# Altium PCB Tigershark 3D R1.8.PcbDoc (part 2 of 3)
Units mil, origin at the board's own origin, x right, y up, seen from the top; angles counter-clockwise.
Board outline 5500 x 4600 mil, 4 copper layers (Top Layer, Groun Plane, Power Plane, Bottom Layer), stack 61.73 mil thick; 307 components, 236 nets, 994 pads, 1215 vias.
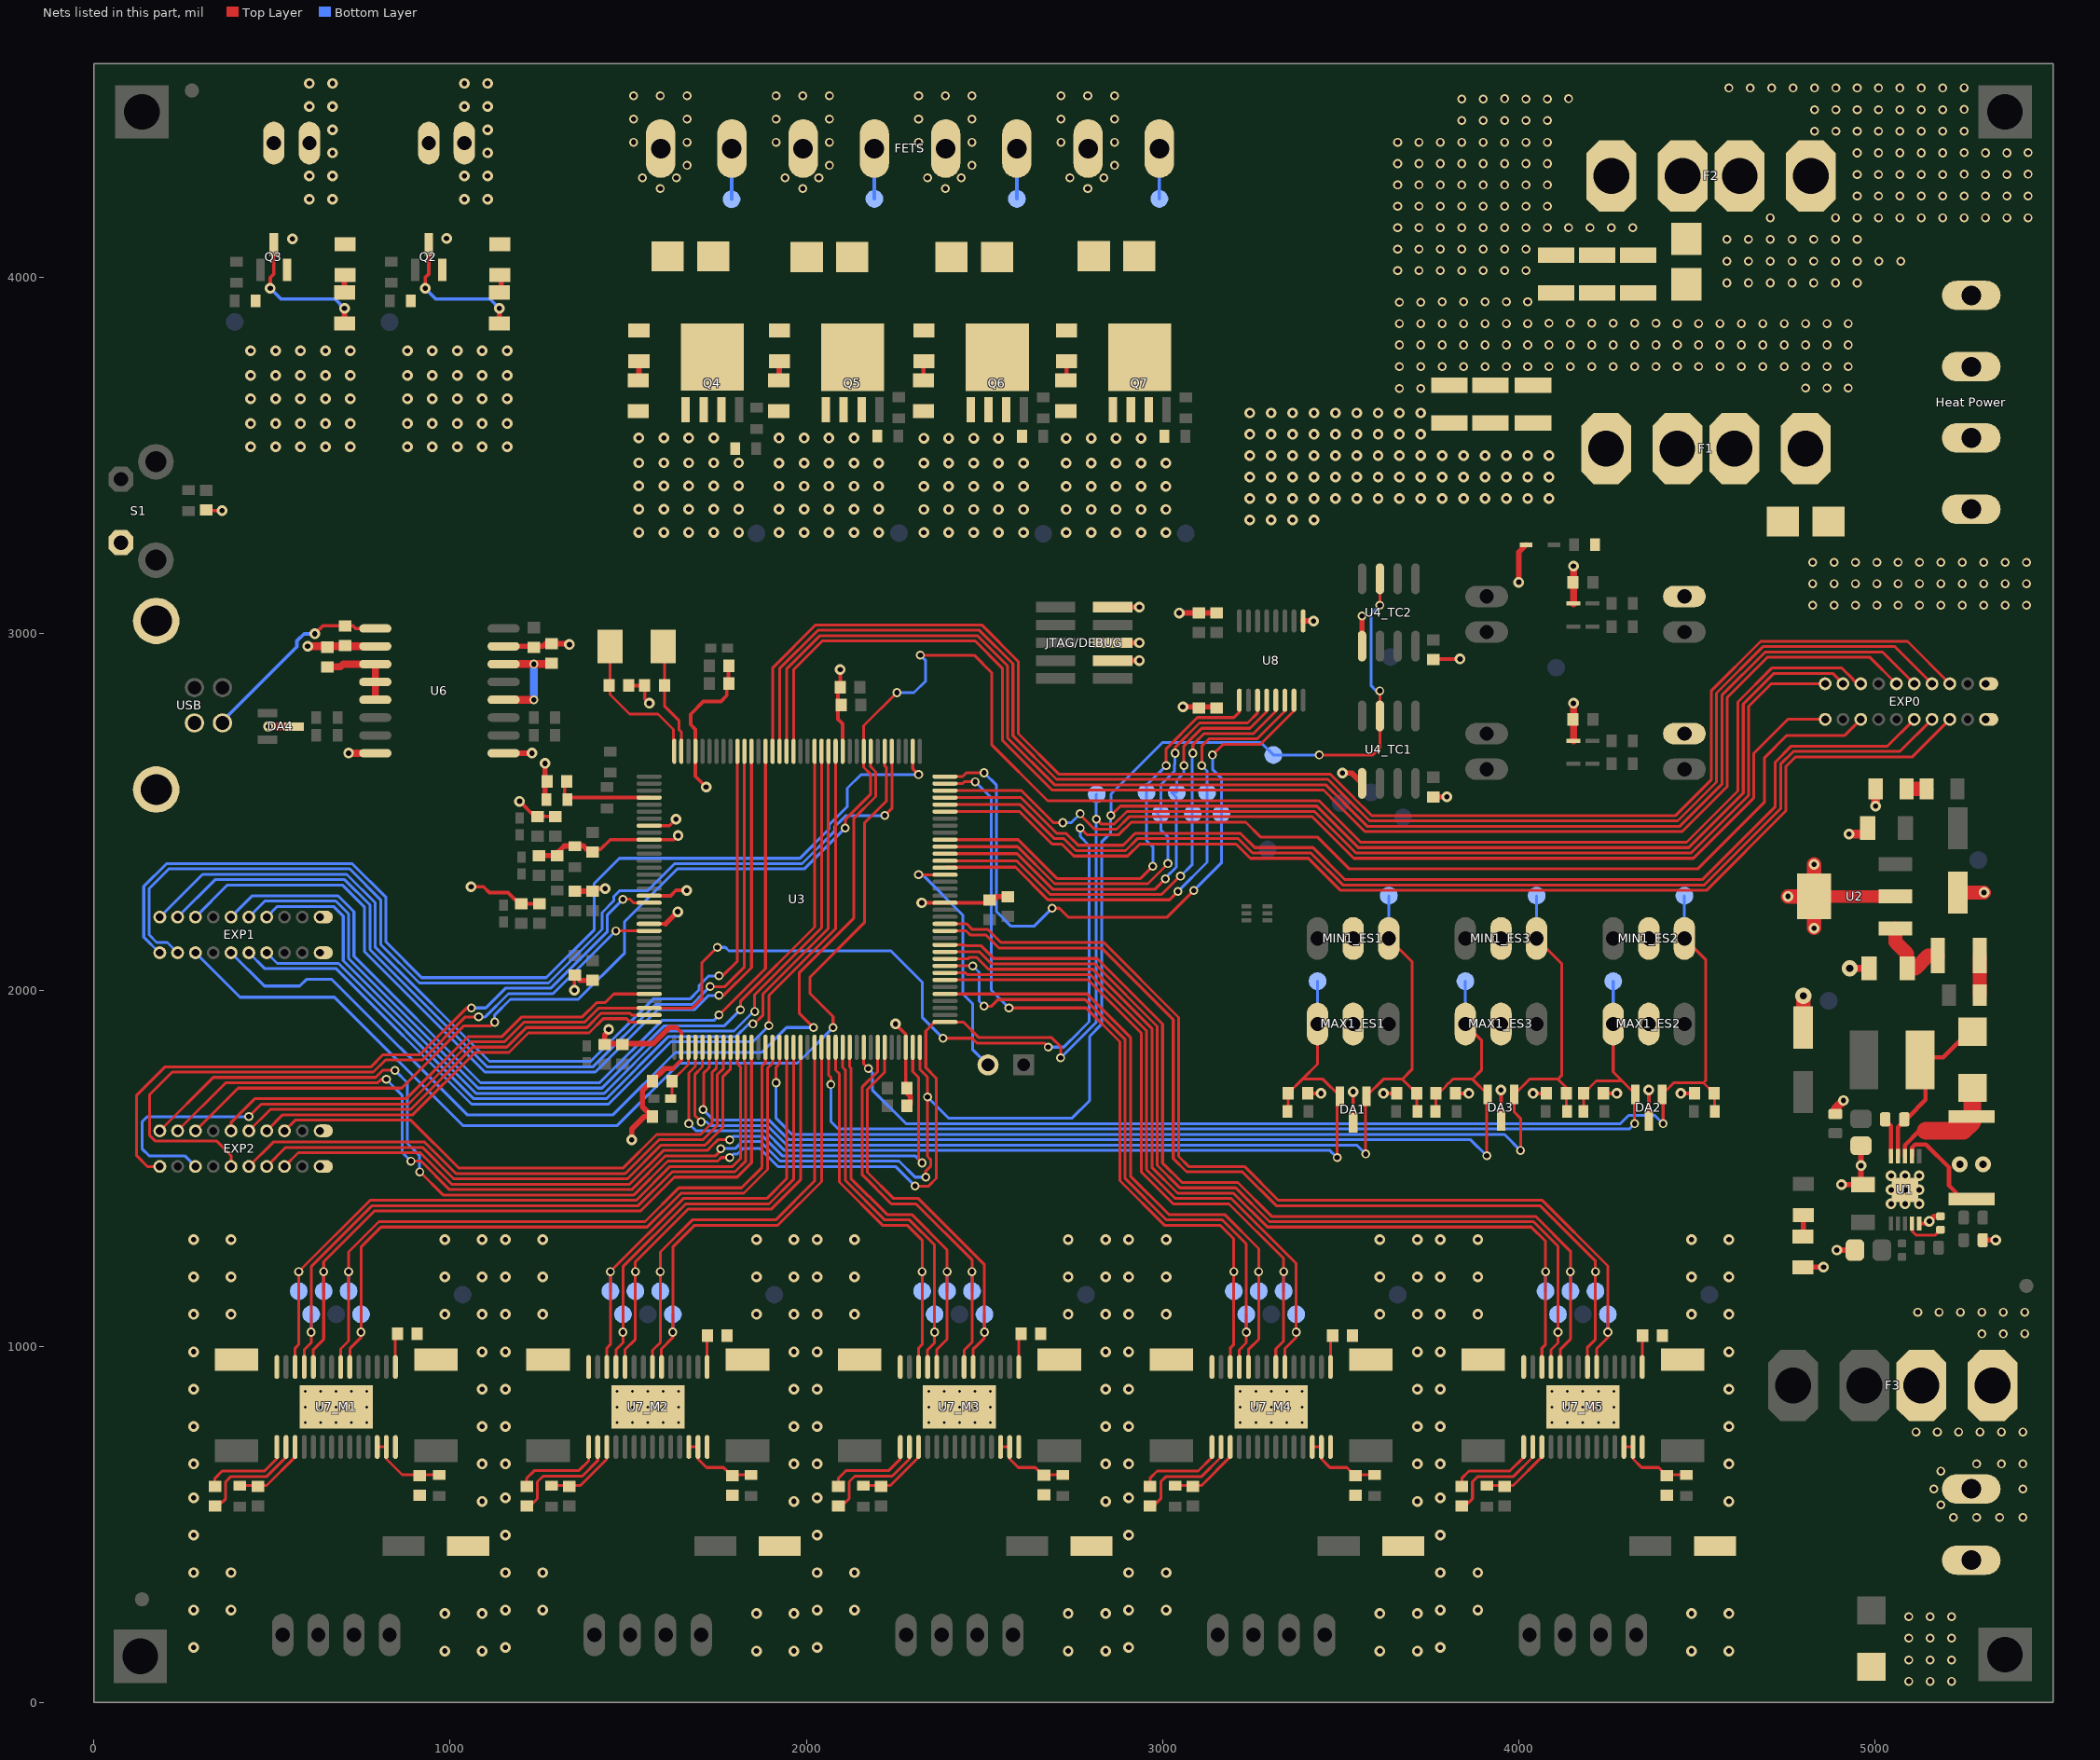
[diagram p4: the nets of this part, all layers, seen from the top]

## Via types
v1: diameter 25, hole 15, Top Layer to Bottom Layer, tented both sides, 594 vias
v2: diameter 30, hole 15, Top Layer to Bottom Layer, tented both sides, 518 vias
v3: diameter 19.68, hole 7.87, Top Layer to Bottom Layer, tented both sides, 75 vias
v4: diameter 50, hole 28, Top Layer to Bottom Layer, tented both sides, 10 vias
v5: diameter 30, hole 15, Top Layer to Bottom Layer, 9 vias
v6: diameter 45, hole 20, Top Layer to Bottom Layer, tented both sides, 9 vias

## Nets (pads, with @x,y where several pads share a name; then routed paths per layer and width w, separated by ;. In a path a pad name is that pad's centre, name@x,y a point inside that pad or via, vN(x,y) a via of type N, cw(c..) or ccw(c..) an arc to the next point about the centre after c; other vN are vias at no path point) (continued)
+12VCC2: C8.2 C12.2 C14.2 D6.2 D12.2 D15.2 D17.2 F1.2 FAN-1.1 FAN-2.1 FETS.1 FETS.3 FETS.5 R1.2 R13.1 R47.1 R56.2 R60.2 R64.2
  other v1: 1590,4250 1990,4250 2390,4250 1540,4280 1635,4280 1940,4280 2035,4280 2340,4280 2435,4280 1665,4315 2065,4315 2465,4315 1515,4380 1665,4380 1915,4380 2065,4380 2315,4380 2465,4380 1515,4445 1665,4445 1915,4445 2065,4445 2315,4445 2465,4445 1515,4510 1590,4510 1665,4510 1915,4510 1990,4510 2065,4510 2315,4510 2390,4510 2465,4510
  other v2: 3245,3320 3305,3320 3365,3320 3425,3320 3245,3380 3305,3380 3365,3380 3425,3380 3485,3380 3545,3380 3605,3380 3665,3380 3725,3380 3785,3380 3845,3380 3905,3380 3965,3380 4025,3380 4085,3380 3245,3440 3305,3440 3365,3440 3425,3440 3485,3440 3545,3440 3605,3440 3665,3440 3725,3440 3785,3440 3845,3440 3905,3440 3965,3440 4025,3440 4085,3440 3245,3500 3305,3500 3365,3500 3425,3500 3485,3500 3545,3500 3605,3500 3665,3500 3725,3500 3785,3500 3845,3500 3905,3500 3965,3500 4025,3500 4085,3500 3245,3560 3305,3560 3365,3560 3425,3560 3485,3560 3545,3560 3605,3560 3665,3560 3725,3560 3245,3620 3305,3620 3365,3620 3425,3620 3485,3620 3545,3620 3605,3620 3665,3620 3725,3620 605,4220 670,4220 1040,4220 1105,4220 605,4285 670,4285 1040,4285 1105,4285 670,4350 1105,4350 670,4415 1105,4415 605,4480 670,4480 1040,4480 1105,4480 605,4545 670,4545 1040,4545 1105,4545
+12VCC3: C3.2 C5.2 C6.2 D4.2 D19.2 F2.2 FETS.7 R68.2
  other v1: 3660,4020 3720,4020 3780,4020 3840,4020 3900,4020 3960,4020 4020,4020 3660,4080 3720,4080 3780,4080 3840,4080 3900,4080 3960,4080 4020,4080 3660,4140 3720,4140 3780,4140 3840,4140 3900,4140 3960,4140 4020,4140 4080,4140 4140,4140 4200,4140 4260,4140 4320,4140 3660,4200 3720,4200 3780,4200 3840,4200 3900,4200 3960,4200 4020,4200 4080,4200 2790,4250 3660,4260 3720,4260 3780,4260 3840,4260 3900,4260 3960,4260 4020,4260 4080,4260 2740,4280 2835,4280 2865,4315 3660,4320 3720,4320 3780,4320 3840,4320 3900,4320 3960,4320 4020,4320 4080,4320 2715,4380 2865,4380 3660,4380 3720,4380 3780,4380 3840,4380 3900,4380 3960,4380 4020,4380 4080,4380 3840,4441 3900,4441 3960,4441 4020,4441 4080,4441 2715,4445 2865,4445 3840,4501 3900,4501 4020,4501 4080,4501 3960,4502 4140,4502 2715,4510 2790,4510 2865,4510
AN_EXP0: EXP1.7 U3.14 | length 2477.1
  Top Layer w8: v1(1850,1905) 1853.23,1905 1878.5,1930.27 1878.5,1989.71 2061,2172.21 2061,2668.87 U3.14@2062.48,2670.35
  Bottom Layer w8: EXP1.7@485,2105 515,2075 686.51,2075 1066.51,1695 1438.49,1695 1613.49,1870 1802.98,1870 1837.98,1905 v1(1850,1905)
AN_EXP1: EXP1.14 U3.15 | length 2576.5
  Top Layer w8: v1(1855,1940) 1855,1987.43 2042.8,2175.22 U3.15@2042.8,2670.35
  Bottom Layer w8: EXP1.14@485,2205 515,2235 672.72,2235 700,2207.72 700,2082.72 1072.72,1710 1432.28,1710 1607.28,1885 1796.77,1885 1851.77,1940 v1(1855,1940)
AVREF: C65.2 FB9.2 U3.75 | length 165.4
  Top Layer w8: FB9.2@1618.62,1695 1622.56,1698.94 C65.2@1622.56,1745 1668.78,1791.22 U3.75@1668.78,1839.65
BED_PWM: TP38.1 U3.144 U8.7 | length 1884.6
  Top Layer w8: U3.144@2389.25,2599.49 2438.39,2599.49 2448.9,2610 v1(2498.9,2610) ; v1(2690,2230) 2710,2230 2735,2205 3013.14,2205 v1(3087.78,2279.64) ; v1(3140,2660) 3170,2690 3275,2690 3368.98,2783.98 U8.7@3368.98,2813.78
  Bottom Layer w8: v1(2498.9,2610) 2533.9,2575 2533.9,2220 2574.9,2179 2639,2179 v1(2690,2230) ; v1(3087.78,2279.64) 3165,2356.86 3165,2595 3140,2620 v1(3140,2660)
DIR1: TP39_M1.1 U3.87 U7_M1.20 | length 1964.8
  Top Layer w8: U7_M1.20@718.39,942.2 718.39,993.39 750,1025 ; v1(750,1040) 750,1278.93 806.07,1335 1553.35,1335 1648.35,1430 1824.3,1430 1890.94,1496.64 1890.94,1780.94 1905,1795 U3.87@1905,1839.65
  Bottom Layer w8: v1(750,1040) TP39_M1.1@750,1090
DIR2: TP39_M2.1 U3.94 U7_M2.20 | length 1270.6
  Top Layer w8: U7_M2.20@1593.39,942.2 1593.39,993.17 1625,1024.79 v1(1625,1040) 1625,1278.93 1686.07,1340 1920,1340 2042.8,1462.8 U3.94@2042.8,1839.65
  Bottom Layer w8: v1(1625,1040) TP39_M2.1@1625,1090
DIR3: TP39_M3.1 U3.103 U7_M3.20 | length 1158.3
  Top Layer w8: U3.103@2219.96,1839.65 2219.96,1769.96 2171.22,1721.22 2171.22,1488.78 2245,1415 2314.4,1415 2500,1229.4 v1(2500,1040) 2500,1023.79 2471.21,995 2470,995 2468.39,993.39 U7_M3.20@2468.39,942.2
  Bottom Layer w8: v1(2500,1040) TP39_M3.1@2500,1090
DIR4: TP39_M4.1 U3.116 U7_M4.20 | length 1905.6
  Top Layer w8: U3.116@2389.25,2048.31 2446.69,2048.31 2451.38,2043.62 2797.44,2043.62 2955,1886.07 2955,1496.07 3036.07,1415 3192.72,1415 3375,1232.72 v1(3375,1040) 3375,1025 3343.39,993.39 U7_M4.20@3343.39,942.2
  Bottom Layer w8: v1(3375,1040) TP39_M4.1@3375,1090
DIR5: TP39_M5.1 U3.123 U7_M5.20 | length 2833.8
  Top Layer w8: U3.123@2389.25,2186.1 2450.11,2186.1 2466.21,2170 2509.84,2170 2546.21,2133.62 2834.72,2133.62 3045,1923.35 3045,1533.35 3073.35,1505 3230,1505 3325,1410 4066.07,1410 4250,1226.07 v1(4250,1040) 4250,1025 4218.39,993.39 U7_M5.20@4218.39,942.2
  Bottom Layer w8: v1(4250,1040) TP39_M5.1@4250,1090
DIR_EXP1: EXP1.6 U3.13 | length 2575
  Top Layer w8: v1(1895,1900) 1895,1985 2082.17,2172.17 U3.13@2082.17,2670.35
  Bottom Layer w8: EXP1.6@435,2105 480,2060 680.29,2060 1060.29,1680 1444.71,1680 1619.71,1855 1850,1855 v1(1895,1900)
DIR_EXP2: EXP1.15 U3.16 | length 2592
  Top Layer w8: v1(1815,1945) 1815,1968.64 2023.11,2176.75 U3.16@2023.11,2670.35
  Bottom Layer w8: EXP1.15@435,2205 480,2250 678.93,2250 715,2213.93 715,2088.93 1078.93,1725 1426.07,1725 1601.07,1900 1770,1900 v1(1815,1945)
EN1: TP32_M1.1 U3.86 U7_M1.21 | length 1987.2
  Top Layer w8: U7_M1.21@692.8,942.2 692.8,992.8 715,1015 v1(715,1210) 715,1265.15 799.85,1350 1547.13,1350 1642.13,1445 1818.09,1445 1875.94,1502.86 1875.94,1787.16 1885.32,1796.53 U3.86@1885.32,1839.65
  Bottom Layer w8: TP32_M1.1@715,1155 v1(715,1210)
EN2: TP32_M2.1 U3.93 U7_M2.21 | length 1278.1
  Top Layer w8: U7_M2.21@1567.8,942.2 1567.8,988.8 1590,1011 v1(1590,1210) 1590,1265.15 1679.85,1355 1913.79,1355 2023.11,1464.32 U3.93@2023.11,1839.65
  Bottom Layer w8: TP32_M2.1@1590,1155 v1(1590,1210)
EN3: TP32_M3.1 U3.102 U7_M3.21 | length 1148.4
  Top Layer w8: U3.102@2200.28,1839.65 2200.28,1771.49 2156.22,1727.43 2156.22,1482.57 2238.79,1400 2308.18,1400 2465,1243.18 v1(2465,1210) 2465,1011.21 2442.8,989.01 U7_M3.21@2442.8,942.2
  Bottom Layer w8: TP32_M3.1@2465,1155 v1(2465,1210)
EN4: TP32_M4.1 U3.115 U7_M4.21 | length 1871.7
  Top Layer w8: U3.115@2389.25,2028.62 2791.23,2028.62 2940,1879.85 2940,1489.85 3029.85,1400 3186.51,1400 3340,1246.51 v1(3340,1210) 3340,1015 3317.8,992.8 U7_M4.21@3317.8,942.2
  Bottom Layer w8: TP32_M4.1@3340,1155 v1(3340,1210)
EN5: TP32_M5.1 U3.122 U7_M5.21 | length 2799.8
  Top Layer w8: U3.122@2389.25,2166.42 2448.58,2166.42 2460,2155 2503.62,2155 2540,2118.62 2828.51,2118.62 3030,1917.13 3030,1527.13 3067.13,1490 3223.79,1490 3318.79,1395 4059.85,1395 4215,1239.85 v1(4215,1210) 4215,1020 4192.8,997.8 U7_M5.21@4192.8,942.2
  Bottom Layer w8: TP32_M5.1@4215,1155 v1(4215,1210)
EN_EXP1: EXP1.5 U3.8 | length 2826.6
  Top Layer w8: v1(2020,1895) 1980.61,1934.39 1980.61,2049.39 2132.75,2201.54 2132.75,2480.94 2194.9,2543.08 2194.9,2612.68 2180.59,2626.98 U3.8@2180.59,2670.35
  Bottom Layer w8: EXP1.5@385,2105 478.5,2011.5 577.71,2011.5 596.21,2030 667.87,2030 1047.87,1650 1457.13,1650 1632.13,1825 1874.45,1825 1944.45,1895 v1(2020,1895)
EN_EXP2: EXP1.16 U3.23 | length 2558.6
  Top Layer w8: v1(1755,1930) 1885.32,2060.32 U3.23@1885.32,2670.35
  Bottom Layer w8: EXP1.16@385,2205 445,2265 685.15,2265 730,2220.15 730,2095.15 1085.15,1740 1419.85,1740 1594.85,1915 1740,1915 v1(1755,1930)
ERASE: P1.2 U3.130 | length 695.4
  Top Layer w8: v1(2315,2323.9) U3.130@2389.25,2323.9
  Bottom Layer w8: v1(2315,2323.9) 2326.1,2323.9 2438.9,2211.1 2438.9,1990 2466.4,1962.5 2466.4,1833.6 P1.2@2510,1790
EXP_CS: EXP0.1 U3.142 | length 2835.7
  Top Layer w8: U3.142@2389.25,2560.12 2603.67,2560.12 2693.79,2470 v1(2720,2470) ; v1(2768.9,2495) 2768.9,2491.77 2809.16,2451.5 2870.95,2451.5 2905.95,2486.5 3420.55,2486.5 3537.05,2370 4489.71,2370 4660,2540.29 4660,2665 4755,2760 EXP0.1@4860,2760
  Bottom Layer w8: v1(2720,2470) 2743.9,2470 v1(2768.9,2495)
EXP_CS2: EXP2.1 U3.55 | length 1945.6
  Top Layer w8: EXP2.1@185,1505 150,1505 120,1535 120,1705 200,1785 778.23,1785 811.98,1818.75 915.26,1818.75 1046.51,1950 v1(1060,1950) ; v1(1485,2255) 1505,2255 1514.84,2245.16 U3.55@1558.54,2245.16
  Bottom Layer w8: v1(1060,1950) 1100,1950 1155,2005 1282.37,2005 1441.5,2164.13 1441.5,2211.5 v1(1485,2255)
EXP_INTERRUP1: EXP0.16 U3.19 | length 4078.2
  Top Layer w8: U3.19@1964.06,2670.35 1964.06,2899.35 2044.71,2980 2473.64,2980 2550,2903.64 2550,2701.36 2689.86,2561.5 3451.85,2561.5 3492.19,2521.16 3492.19,2520.93 3568.12,2445 4458.64,2445 4585,2571.36 4585,2821.36 4697.64,2934 4986,2934 EXP0.16@5060,2860
EXP_INTERRUP2: EXP0.15 U3.20 | length 4161.2
  Top Layer w8: U3.20@1944.37,2670.35 1944.37,2900.88 2038.49,2995 2479.85,2995 2565,2909.85 2565,2707.57 2696.07,2576.5 3458.06,2576.5 3507.19,2527.37 3507.19,2527.14 3574.33,2460 4452.43,2460 4570,2577.57 4570,2827.57 4691.43,2949 5021,2949 EXP0.15@5110,2860
EXP_SYNC: EXP0.6 U3.141 | length 3103.4
  Top Layer w8: U3.141@2389.25,2540.43 2602.14,2540.43 2702.57,2440 2729.45,2440 2762.95,2406.5 2889.59,2406.5 2923.09,2440 3218.79,2440 3258.79,2400 3422.2,2400 3512.2,2310 4514.56,2310 4720,2515.44 4720,2640.15 4764.85,2685 5035,2685 EXP0.6@5110,2760
FET_PWM1: TP43.1 U3.135 U8.1 | length 1283.7
  Top Layer w8: U3.135@2389.25,2422.32 2594.44,2422.32 2703.27,2313.5 2938.14,2313.5 v1(2972.57,2347.93) ; v1(3010,2630) 3010,2677.43 3097.57,2765 3200,2765 3215.43,2780.43 U8.1@3215.43,2813.78
  Bottom Layer w8: v1(2972.57,2347.93) 2972.57,2402.43 2955,2420 2955,2575 v1(3010,2630)
FET_PWM2: TP44.1 U3.134 U8.3 | length 1359.2
  Top Layer w8: U3.134@2389.25,2402.64 2592.91,2402.64 2697.05,2298.5 2958.5,2298.5 v1(3015,2355) ; v1(3035,2665) 3035,2681.21 3103.79,2750 3238.79,2750 3266.61,2777.83 U8.3@3266.61,2813.78
  Bottom Layer w8: v1(3015,2355) 3015,2430 2995,2450 2995,2485 2985,2495 2995,2505 2995,2575.91 3033.5,2614.41 3033.5,2633.5 3035,2635 v1(3035,2665)
FET_PWM3: TP45.1 U3.133 U8.4 | length 1384.9
  Top Layer w8: U3.133@2389.25,2382.95 2591.39,2382.95 2690.84,2283.5 2978.86,2283.5 v1(3007.93,2312.57) ; v1(3060,2630) 3060,2685 3110,2735 3245,2735 3292.2,2782.2 U8.4@3292.2,2813.78
  Bottom Layer w8: v1(3007.93,2312.57) 3007.93,2314.69 3038.5,2345.27 3038.5,2541.5 TP45.1@3025,2555 ; TP45.1@3030,2555 TP45.1@3040,2555 3040,2590 3060,2610 v1(3060,2630)
FET_PWM4: TP46.1 U3.132 U8.5 | length 1407.8
  Top Layer w8: U3.132@2389.25,2363.27 2589.86,2363.27 2684.63,2268.5 2997.09,2268.5 3048.23,2319.64 v1(3050.36,2319.64) ; v1(3085,2665) 3085,2688.79 3116.21,2720 3255,2720 3317.8,2782.8 U8.5@3317.8,2813.78
  Bottom Layer w8: v1(3050.36,2319.64) 3083.5,2352.79 3083.5,2663.5 v1(3085,2665)
FET_PWM5: TP47.1 U3.131 U8.6 | length 1455.5
  Top Layer w8: U3.131@2389.25,2343.58 2389.25,2345 2586.91,2345 2678.41,2253.5 3019.57,2253.5 v1(3043.28,2277.22) ; v1(3110,2630) 3110,2685 3130,2705 3265,2705 3343.39,2783.39 U8.6@3343.39,2813.78
  Bottom Layer w8: v1(3043.28,2277.22) 3125,2358.93 3125,2615 v1(3110,2630)
GND: "Heat Power.2" "Heat Power.4" "Motor Power.2" C1_ES1.2 C1_ES2.2 C1_ES3.2 C2_ES1.2 C2_ES2.2 C2_ES3.2 C3.1 C4.1 C5.1 C6.1 C7.1 C8.1 C9.2 C10.2 C11.2 C12.1 C13.1 C14.1 C17.2 C20.2 C21.2 C22.2 C23.1 C24.2 C25.1 C26.2 C27.1 C28.1 C29.2 C30_TR1.1 C30_TR2.1 C31_TC1.1 C31_TC2.1 C32.1 C33.1 C36.1 C37.1 C38.1 C39.1 C41.1 C42.1 C43.1 C44.1 C45.1 C46.1 C47.1 C48.1 C53.1 C54.1 C55.1 C56.1 C57.1 C60.1 C61.1 C63.1 C64.1 C65.1 C69_M1.2 C69_M2.2 C69_M3.2 C69_M4.2 C69_M5.2 C71_M1.1 C71_M2.1 C71_M3.1 C71_M4.1 C71_M5.1 C73.1 C75_M1.1 C75_M2.1 C75_M3.1 C75_M4.1 C75_M5.1 D1.1 D4.1 D5_TR1.1 D5_TR2.1 D6.1 D7.1 D8.A D9.1 DA1.3 DA2.3 DA3.3 EXP0.10 EXP0.11 EXP1.10 EXP1.11 EXP2.10 EXP2.11 JTAG/DEBUG.3 JTAG/DEBUG.5 JTAG/DEBUG.9 MAX1_ES1.2 MAX1_ES2.2 MAX1_ES3.2 MIN1_ES1.2 MIN1_ES2.2 MIN1_ES3.2 P2_TR1.2 P2_TR2.2 Q2.2 Q3.2 Q4.1 Q4.2 Q4.3 Q5.1 Q5.2 Q5.3 Q6.1 Q6.2 Q6.3 Q7.1 Q7.2 Q7.3 R4.2 R9.1 R12.2 R23.1 R32_M1.1 R32_M2.1 R32_M3.1 R32_M4.1 R32_M5.1 R33_M1.1 R33_M2.1 R33_M3.1 R33_M4.1 R33_M5.1 R46.2 R55.2 R59.2 R63.2 R67.2 R71.2 S1.2 U1.5 U1.7 U1.11 U2.2 U2.4 U3.12 U3.33 U3.44 U3.46 U3.54 U3.58 U3.74 U3.106 U3.126 U4_TC1.1 U4_TC2.1 U6.9 U6.15 U7_M1.14 U7_M1.28 U7_M1.29 U7_M2.14 U7_M2.28 U7_M2.29 U7_M3.14 U7_M3.28 U7_M3.29 U7_M4.14 U7_M4.28 U7_M4.29 U7_M5.14 U7_M5.28 U7_M5.29 U8.9 | length 6528.6
  Top Layer w10: C63.1@315,3347.44 316.44,3346 v2(360,3346) ; v2(1058.9,2290) 1093.9,2290 1109.9,2274 1162.46,2274 1193.9,2242.56 C54.1@1245.12,2242.56 ; v2(1195,2530) 1237.44,2487.56 C60.1@1293.9,2487.56 ; v2(1348.9,2000) C42.1@1348.9,2042.44 ; C41.1@1383.9,2395 1422.13,2395 1449.45,2422.32 U3.46@1558.54,2422.32 1628.74,2422.32 v2(1640,2433.58) ; v2@1445,1885 v2(1445,1890) ; C43.1@1501.46,2855 C44.1@1546.34,2855 1546.34,2817.56 v2(1558.9,2805) ; U3.58@1558.54,2186.1 1605,2186.1 ; U3.54@1558.54,2264.84 1618.74,2264.84 1633.9,2280 v2(1663.9,2280) ; U3.44@1558.54,2461.69 1615.59,2461.69 v2(1633.9,2480) ; 1624.61,1780 1649.09,1804.48 U3.74@1649.09,1839.65 1649.09,1880.91 1635,1895 ; v2(1718.62,2570) 1688.46,2600.16 U3.33@1688.46,2670.35 1688.46,2731.89 1675,2745.35 1675,2774.3 1710.7,2810 1760,2810 1776.46,2826.46 1776.46,2860 1781.09,2864.63 1781.09,2880 1781.46,2880.37 C32.1@1781.46,2895 ; v2(2095,2900) 2095,2856.22 2088.78,2850 2088.78,2760.12 2101.85,2747.05 U3.12@2101.85,2670.35 ; v2(2250,1905) 2279.02,1875.98 U3.106@2279.02,1839.65 C23.1@2279.02,1715.13 ; v2@2319.05,2245.16 U3.126@2389.25,2245.16 C39.1@2519.05,2245.16 ; C2_ES1.2@3407.56,1710 v2(3445,1710) ; DA1.3@3535,1627.6 v2(3535,1715) ; v2(3620,1710) C1_ES1.2@3657.91,1710 ; C31_TC2.1@3777.56,2929.49 v2(3835,2929.49) ; C2_ES3.2@3822.56,1710 v2(3860,1710) ; DA3.3@3950,1632.6 v2(3950,1720) ; v2(4040,1710) C1_ES3.2@4077.91,1710 ; C2_ES2.2@4237.56,1710 v2(4275,1710) ; DA2.3@4365,1632.6 v2(4365,1720) ; v2(4455,1710) C1_ES2.2@4492.91,1710 ; U1.5@5123.94,1344.83 v2@5146.09,1344.83
  Top Layer w12: U1.7@5104.26,1533.8 5104.26,1558.49 5112.65,1566.88 5143.13,1566.88 5207.59,1502.42 5207.59,1451.36 5226,1432.95
  Top Layer w15: U6.9@1150.12,2665 v2(1230,2665) ; U6.15@1150.12,2965 1260,2965 1267.56,2972.56 C56.1@1285,2972.56 v2@1332.44,2972.56 ; C28.1@1243.9,2377.56 1293.9,2377.56 1320.87,2404.53 1374.37,2404.53 C41.1@1383.9,2395 ; R23.1@1266.34,2536.97 v2(1266.34,2636.22) ; C37.1@1343.9,2277.56 1393.9,2277.56 1401.34,2285 v2(1435,2285) ; C42.1@1348.9,2042.44 1363.9,2027.44 C48.1@1400,2027.44 ; C27.1@1433.9,1847.56 1433.9,1873.9 v2@1445,1885 ; C27.1@1446.46,1850 1570,1850 1615,1895 1635,1895 ; v2(1510,1580) 1510,1610 1545,1645 C64.1@1567.44,1645 1540,1672.44 1540,1717.56 C65.1@1567.44,1745 1602.44,1780 1624.61,1780 ; 1605,2186.1 v2(1638.9,2220) ; C23.1@2279.02,1715.13 2291.97,1702.18 C45.1@2291.97,1680 ; C39.1@2519.05,2245.16 2536.46,2262.56 C46.1@2568.9,2262.56 ; JTAG/DEBUG.3@2859.92,2925 v2(2935,2925) ; JTAG/DEBUG.5@2859.92,2975 v2(2935,2975) ; JTAG/DEBUG.9@2859.92,3075 v2(2935,3075) ; v2(3046.44,3058.56) C20.2@3102,3058.56 C17.2@3152,3058.56 ; v2(3057,2795) C26.2@3149.44,2795 ; U8.9@3394.57,3036.22 3423.78,3036.22 v2(3424,3036) ; v2(3505,2609.49) 3531.02,2609.49 U4_TC1.1@3560,2580.51 ; U4_TC2.1@3560,2965.51 v1(3560,3050) ; C31_TC1.1@3760,2542.44 v2(3797.95,2542.44) ; v2(4000,3145) 4000,3229.37 D1.1@4020.63,3250 ; D7.1@4798.46,1222.31 v2(4855.57,1222.31) ; v2(4892.57,1270.31) C10.2@4943.57,1270.31 ; v2(4905.57,1454.31) 4905.72,1454.46 C9.2@4966.57,1454.46 ; C9.2@4960.57,1460.46 v2(4960.57,1507.31) C21.2@4960.57,1563.31 ; v2@5146.09,1344.83 5166.57,1365.31 C22.2@5183.57,1365.31 ; R12.2@5302.35,1298.32 v2(5338.57,1298.31)
  Top Layer w20: D5_TR1.1@4153.43,2700 v2(4153.43,2805) ; D5_TR2.1@4153.43,3085 v2(4153.43,3190) ; v6(4929,2061) C4.1@4983.85,2061
  Top Layer w25: C11.2@4888.57,1652.09 4888.57,1667.31 v2(4911.57,1690.31) ; v2(4927,2438) C7.1@4961.85,2438 ; v2(5001.61,2516.61) D9.1@5001.61,2564.5
  Top Layer w35: U2.4@4829,2263 U2.2@5057.17,2263
  Top Layer w40: v2(4756,2263) U2.4@4828.83,2263 ; C24.2@4798.57,1894.87 4799,1895.29 v6(4799,1984) ; v2@4828.83,2174.17 U2.4@4828.83,2263 ; v2(4829,2353) 4829,2263 U2.4@4828.83,2263 ; C29.2@5232.55,2274 v2(5306,2274)
  other v1: 5095,60 5155,60 5215,60 5095,120 5155,120 5215,120 5095,181 5155,181 5215,181 5095,241 5155,241 5215,241 4825,3080 4885,3080 4945,3080 5005,3080 5065,3080 5125,3080 5185,3080 5245,3080 5305,3080 5365,3080 5425,3080 4825,3141 4885,3141 4945,3141 5005,3141 5065,3141 5125,3141 5185,3141 5245,3141 5305,3141 5365,3141 5425,3141 4825,3201 4885,3201 4945,3201 5005,3201 5065,3201 5125,3201 5185,3201 5245,3201 5305,3201 5365,3201 5425,3201 3665,3689 3725,3689 4805,3690 4865,3690 4925,3690 3665,3750 3725,3750 3785,3750 3845,3750 3905,3750 3965,3750 4025,3750 4085,3750 4145,3750 4205,3750 4265,3750 4325,3750 4385,3750 4445,3750 4505,3750 4565,3750 4625,3750 4685,3750 4745,3750 4805,3750 4865,3750 4925,3750 3665,3811 3725,3811 3785,3811 3845,3811 3905,3811 3965,3811 4025,3811 4085,3811 4145,3811 4205,3811 4265,3811 4325,3811 4385,3811 4445,3811 4505,3811 4565,3811 4625,3811 4685,3811 4745,3811 4805,3811 4865,3811 4925,3811 3665,3871 3725,3871 3785,3871 3845,3871 3905,3871 3965,3871 4025,3871 4445,3871 4505,3871 4565,3871 4625,3871 4685,3871 4745,3871 4805,3871 4865,3871 4925,3871 4085,3872 4145,3872 4205,3872 4265,3872 4325,3872 4385,3872 3665,3931 3725,3931 3785,3932 3845,3932 3905,3932 3965,3932 4025,3932
  other v2: 985,145 1090,145 1860,145 1965,145 2735,145 2840,145 3610,145 3715,145 4485,145 4590,145 280,155 1155,155 2030,155 2905,155 3780,155 985,250 1090,250 1860,250 1965,250 2735,250 2840,250 3610,250 3715,250 4485,250 4590,250 280,260 385,260 1155,260 1260,260 2030,260 2135,260 2905,260 3010,260 3780,260 3885,260 280,365 385,365 1155,365 1260,365 2030,365 2135,365 2905,365 3010,365 3780,365 3885,365 280,470 1155,470 2030,470 2905,470 3780,470 1090,565 1965,565 2840,565 3715,565 4590,565 280,575 1155,575 2030,575 2905,575 3780,575 280,670 1090,670 1155,670 1965,670 2030,670 2840,670 2905,670 3715,670 3780,670 4590,670 280,775 1090,775 1155,775 1965,775 2030,775 2840,775 2905,775 3715,775 3780,775 4590,775 280,880 1090,880 1155,880 1965,880 2030,880 2840,880 2905,880 3715,880 3780,880 4590,880 280,985 1090,985 1155,985 1965,985 2030,985 2840,985 2905,985 3715,985 3780,985 4590,985 280,1090 385,1090 985,1090 1090,1090 1155,1090 1260,1090 1860,1090 1965,1090 2030,1090 2135,1090 2735,1090 2840,1090 2905,1090 3010,1090 3610,1090 3715,1090 3780,1090 3885,1090 4485,1090 4590,1090 280,1195 385,1195 985,1195 1090,1195 1155,1195 1260,1195 1860,1195 1965,1195 2030,1195 2135,1195 2735,1195 2840,1195 2905,1195 3010,1195 3610,1195 3715,1195 3780,1195 3885,1195 4485,1195 4590,1195 280,1300 385,1300 985,1300 1090,1300 1155,1300 1260,1300 1860,1300 1965,1300 2030,1300 2135,1300 2735,1300 2840,1300 2905,1300 3010,1300 3610,1300 3715,1300 3780,1300 3885,1300 4485,1300 4590,1300 5152.57,1351.31 4829,2174 2323.9,2245 1335,2970 2329.5,3284.19 2399.5,3284.19 2469.5,3284.19 2539.5,3284.19 2609.5,3284.19 2729.5,3284.19 2799.5,3284.19 2869.5,3284.19 2939.5,3284.19 3009.5,3284.19 1530,3285 1600,3285 1670,3285 1740,3285 1810,3285 1923.5,3284.61 1993.5,3284.61 2063.5,3284.61 2133.5,3284.61 2203.5,3284.61 2329.5,3349.19 2399.5,3349.19 2469.5,3349.19 2539.5,3349.19 2609.5,3349.19 2729.5,3349.19 2799.5,3349.19 2869.5,3349.19 2939.5,3349.19 3009.5,3349.19 1530,3350 1600,3350 1670,3350 1740,3350 1810,3350 1923.5,3349.61 1993.5,3349.61 2063.5,3349.61 2133.5,3349.61 2203.5,3349.61 2329.5,3414.19 2399.5,3414.19 2469.5,3414.19 2539.5,3414.19 2609.5,3414.19 2729.5,3414.19 2799.5,3414.19 2869.5,3414.19 2939.5,3414.19 3009.5,3414.19 1530,3415 1600,3415 1670,3415 1740,3415 1810,3415 1923.5,3414.61 1993.5,3414.61 2063.5,3414.61 2133.5,3414.61 2203.5,3414.61 2329.5,3479.19 2399.5,3479.19 2469.5,3479.19 2539.5,3479.19 2609.5,3479.19 2729.5,3479.19 2799.5,3479.19 2869.5,3479.19 2939.5,3479.19 3009.5,3479.19 1530,3480 1600,3480 1670,3480 1740,3480 1810,3480 1923.5,3479.61 1993.5,3479.61 2063.5,3479.61 2133.5,3479.61 2203.5,3479.61 440,3525 510,3525 580,3525 650,3525 720,3525 880,3525 950,3525 1020,3525 1090,3525 1160,3525 2329.5,3549.19 2399.5,3549.19 2469.5,3549.19 2539.5,3549.19 2729.5,3549.19 2799.5,3549.19 2869.5,3549.19 2939.5,3549.19 1530,3550 1600,3550 1670,3550 1740,3550 1923.5,3549.61 1993.5,3549.61 2063.5,3549.61 2133.5,3549.61 440,3590 510,3590 580,3590 650,3590 720,3590 880,3590 950,3590 1020,3590 1090,3590 1160,3590 440,3660 510,3660 580,3660 650,3660 720,3660 880,3660 950,3660 1020,3660 1090,3660 1160,3660 440,3725 510,3725 580,3725 650,3725 720,3725 880,3725 950,3725 1020,3725 1090,3725 1160,3725 440,3795 510,3795 580,3795 650,3795 720,3795 880,3795 950,3795 1020,3795 1090,3795 1160,3795 557,4109 990,4110
  other v3: 593.39,786.69 636.69,786.69 680,786.69 723.31,786.69 766.61,786.69 1468.39,786.69 1511.69,786.69 1555,786.69 1598.31,786.69 1641.61,786.69 2343.39,786.69 2386.69,786.69 2430,786.69 2473.31,786.69 2516.61,786.69 3218.39,786.69 3261.69,786.69 3305,786.69 3348.31,786.69 3391.61,786.69 4093.39,786.69 4136.69,786.69 4180,786.69 4223.31,786.69 4266.61,786.69 593.39,830 636.69,830 680,830 723.31,830 766.61,830 1468.39,830 1511.69,830 1555,830 1598.31,830 1641.61,830 2343.39,830 2386.69,830 2430,830 2473.31,830 2516.61,830 3218.39,830 3261.69,830 3305,830 3348.31,830 3391.61,830 4093.39,830 4136.69,830 4180,830 4223.31,830 4266.61,830 593.39,873.31 636.69,873.31 680,873.31 723.31,873.31 766.61,873.31 1468.39,873.31 1511.69,873.31 1555,873.31 1598.31,873.31 1641.61,873.31 2343.39,873.31 2386.69,873.31 2430,873.31 2473.31,873.31 2516.61,873.31 3218.39,873.31 3261.69,873.31 3305,873.31 3348.31,873.31 3391.61,873.31 4093.39,873.31 4136.69,873.31 4180,873.31 4223.31,873.31 4266.61,873.31
  other v5: 5045.2,1399.94 5084.57,1399.94 5123.94,1399.94 5045.2,1439.31 5084.57,1439.31 5123.94,1439.31 5045.2,1478.68 5084.57,1478.68 5123.94,1478.68
  other v6: 5238,1511 5303,1511
GPIO0_EXP: EXP0.7 U3.140 | length 3157.7
  Top Layer w8: U3.140@2389.25,2520.75 2600.61,2520.75 2696.36,2425 2723.24,2425 2756.74,2391.5 2895.8,2391.5 2929.3,2425 3212.57,2425 3252.57,2385 3415.98,2385 3505.98,2295 4520.77,2295 4735,2509.23 4735,2633.93 4771.07,2670 5070,2670 EXP0.7@5160,2760
GPIO1_EXP: EXP0.8 U3.139 | length 3211.9
  Top Layer w8: U3.139@2389.25,2501.06 2599.08,2501.06 2690.15,2410 2717.02,2410 2750.52,2376.5 2902.01,2376.5 2935.51,2410 3206.36,2410 3246.36,2370 3409.77,2370 3499.77,2280 4526.98,2280 4750,2503.02 4750,2627.72 4777.28,2655 5105,2655 EXP0.8@5210,2760
GPIO2_EXP: EXP0.14 U3.21 | length 4244.2
  Top Layer w8: U3.21@1924.69,2670.35 1924.69,2902.41 2032.28,3010 2486.07,3010 2580,2916.07 2580,2713.79 2702.29,2591.5 3464.27,2591.5 3522.19,2533.58 3522.19,2533.35 3580.54,2475 4446.21,2475 4555,2583.79 4555,2833.79 4685.21,2964 5056,2964 EXP0.14@5160,2860
GPIO3_EXP: EXP0.13 U3.22 | length 4327.2
  Top Layer w8: U3.22@1905,2670.35 1905,2903.93 2026.07,3025 2492.28,3025 2595,2922.28 2595,2720 2708.5,2606.5 3470.48,2606.5 3537.19,2539.8 3537.19,2539.57 3586.76,2490 4440,2490 4540,2590 4540,2840 4679,2979 5091,2979 EXP0.13@5210,2860
GPIO4_EXP: EXP2.5 U3.59 | length 1989.9
  Top Layer w8: EXP2.5@385,1505 385,1536.11 345.11,1576 172.99,1576 156,1592.99 156,1706 220,1770 784.45,1770 818.2,1803.75 921.47,1803.75 1042.72,1925 v1(1080,1925) ; v1(1465,2166.42) U3.59@1558.54,2166.42
  Bottom Layer w8: v1(1080,1925) 1098.79,1925 1163.79,1990 1288.58,1990 v1(1465,2166.42)
GPIO5_EXP: EXP2.16 U3.68 | length 1346.3
  Top Layer w8: EXP2.16@385,1605 385,1628.23 451.77,1695 876.36,1695 1051.36,1870 1146.36,1870 1201.36,1925 1371.36,1925 1411.36,1965 1435,1965 1459.25,1989.25 U3.68@1558.54,1989.25
I2C_SCL: EXP0.3 EXP2.3 U3.70 | length 6434.8
  Top Layer w8: v1@437.5,1647.5 470,1680 882.57,1680 1057.57,1855 1152.57,1855 1207.57,1910 1377.57,1910 1417.46,1949.88 U3.70@1558.54,1949.88 1679.88,1949.88 1706.4,1976.4 1706.4,2076.4 v1(1750,2120) ; v1(2383.9,1865) 2465,1865 2478.5,1851.5 2667.4,1851.5 v1(2678.9,1840) ; v1(2768.9,2455) 2787.4,2436.5 2877.16,2436.5 2912.16,2471.5 3233.5,2471.5 3275,2430 3434.62,2430 3524.62,2340 4502.13,2340 4690,2527.87 4690,2652.57 4752.43,2715 4915,2715 EXP0.3@4960,2760
  Bottom Layer w8: EXP2.3@285,1505 255,1535 155,1535 135,1555 135,1630 150,1645 v1(435,1645) ; v1(1750,2120) 1772.57,2120 1782.57,2110 2237.57,2110 2325,2022.57 2325,1923.9 v1(2383.9,1865) ; v1(2678.9,1840) 2722.68,1840 2765,1882.32 2765,1882.43 2793.9,1911.32 2793.9,2406.1 2768.9,2431.1 v1(2768.9,2455)
I2C_SDA: EXP0.18 EXP2.18 U3.9 | length 6212.1
  Top Layer w8: EXP2.18@285,1605 405,1725 863.93,1725 1038.93,1900 1115,1900 v1(1125,1910) ; v1(2109.25,2455) 2109.25,2478.65 2179.9,2549.29 2179.9,2606.46 2160.91,2625.45 U3.9@2160.91,2670.35 2160.91,2742.01 v1(2253.9,2835) ; v1(2320,2940) 2471.21,2940 2520,2891.21 2520,2688.93 2677.43,2531.5 3439.19,2531.5 3555.69,2415 4471.07,2415 4615,2558.93 4615,2808.93 4710.07,2904 4907.01,2904 4939,2872.01 4939,2871 4950,2860 EXP0.18@4960,2860
  Bottom Layer w8: v1(1125,1910) 1125,1930 1169,1974 1359.67,1974 1490,2104.33 1490,2192.43 1637.57,2340 1994.25,2340 v1(2109.25,2455) ; v1(2253.9,2835) 2302.13,2835 2335,2867.87 2335,2925 v1(2320,2940)
INPUT_GND: C58.1 C59.1 DA4.3 U6.2 U6.8 USB.4 USB.5 USB.6 | length 337.2
  Top Layer w22: v2(490,2740) DA4.3@562.4,2740 ; v2(600,2965) U6.2@789.88,2965 ; v2(715,2665) U6.8@789.88,2665
MAX_ES1: C2_ES1.1 DA1.2 MAX1_ES1.1 R3_ES1.2 TP10_ES1.1 U3.76 | length 2781.9
  Top Layer w8: v1(1670,1625) 1670,1767.43 1688.46,1785.89 U3.76@1688.46,1839.65 ; R3_ES1.2@3350.94,1660 3352.44,1661.5 C2_ES1.1@3352.44,1710 3392.44,1750 ; MAX1_ES1.1@3435,1905 3435,1792.56 3392.44,1750 ; v1(3490,1530) 3490,1694.8 DA1.2@3497.6,1702.4 3450,1750 3392.44,1750
  Bottom Layer w8: v1(1670,1625) 1690,1605 1883.64,1605 1938.64,1550 3470,1550 v1(3490,1530) ; MAX1_ES1.1@3435,1905 TP10_ES1.1@3435,2025
MAX_ES2: C2_ES2.1 DA2.2 MAX1_ES2.1 R3_ES2.2 TP10_ES2.1 U3.95 | length 3081.9
  Top Layer w8: U3.95@2062.48,1839.65 2062.48,1761.42 2068.9,1755 v1(2068.9,1735) ; R3_ES2.2@4180.94,1660 4182.44,1661.5 C2_ES2.1@4182.44,1710 4217.44,1745 4290,1745 ; MAX1_ES2.1@4265,1905 4265,1770 DA2.2@4327.6,1707.4 4325,1704.8 v1(4325,1625)
  Bottom Layer w8: v1(2068.9,1735) 2068.9,1631.1 2090,1610 4310,1610 v1(4325,1625) ; MAX1_ES2.1@4265,1905 TP10_ES2.1@4265,2025
MAX_ES3: C2_ES3.1 DA3.2 MAX1_ES3.1 R3_ES3.2 TP10_ES3.1 U3.78 | length 3144.2
  Top Layer w8: v1(1710,1665) 1711.49,1666.49 1711.49,1766.49 1727.83,1782.83 U3.78@1727.83,1839.65 ; R3_ES3.2@3765.94,1660 3767.44,1661.5 C2_ES3.1@3767.44,1710 3774.95,1710 3795.81,1730.86 3795.81,1732.27 3802.25,1738.72 3803.67,1738.72 3815.39,1750.43 3870.43,1750.43 3895,1775 3895,1860 MAX1_ES3.1@3850,1905 ; 3870,1750 DA3.2@3912.6,1707.4 3910,1704.8 v1(3910,1535)
  Bottom Layer w8: v1(1710,1665) 1740,1635 1896.07,1635 1951.07,1580 3865,1580 v1(3910,1535) ; MAX1_ES3.1@3850,1905 TP10_ES3.1@3850,2025
MCCDZ: EXP2.14 U3.72 | length 1207.9
  Top Layer w8: EXP2.14@485,1605 530,1650 895,1650 1070,1825 1165,1825 1220,1880 1390,1880 1429.88,1919.88 1495.12,1919.88 1504.49,1910.51 U3.72@1558.54,1910.51
MCCK: EXP2.15 U3.71 | length 1262.1
  Top Layer w8: EXP2.15@435,1605 495,1665 888.79,1665 1063.79,1840 1158.79,1840 1213.79,1895 1383.79,1895 1423.67,1934.88 1505.12,1934.88 1509.8,1930.2 U3.71@1558.54,1930.2
MCDZ0: EXP2.8 U3.107 | length 2265.2
  Top Layer w8: EXP2.8@535,1505 573.5,1543.5 915.95,1543.5 1004.45,1455 1503.64,1455 1598.64,1550 1721.87,1550 1736.5,1564.63 1736.5,1564.73 1750.27,1578.5 1750.37,1578.5 1751.87,1580 v1(1785,1580) ; U3.107@2298.7,1839.65 2298.7,1771.3 2315,1755 2315,1525 v1(2325,1515)
  Bottom Layer w8: v1(1785,1580) 1795,1590 1877.43,1590 1932.43,1535 2305,1535 v1(2325,1515)
MCDZ1: EXP2.7 U3.81 | length 1633
  Top Layer w8: EXP2.7@485,1505 538.5,1558.5 922.16,1558.5 1010.66,1470 1497.43,1470 1592.43,1565 1715.66,1565 1721.5,1570.84 1721.5,1570.95 1744.05,1593.5 1744.16,1593.5 1765,1614.34 1765,1756.36 1786.89,1778.25 U3.81@1786.89,1839.65
MCDZ2: EXP2.6 U3.80 | length 1662.4
  Top Layer w8: EXP2.6@435,1505 503.5,1573.5 928.37,1573.5 1016.87,1485 1491.21,1485 1586.21,1580 1709.34,1580 1737.84,1608.5 1737.95,1608.5 1750,1620.55 1750,1762.57 1767.2,1779.78 U3.80@1767.2,1839.65
MCDZ3: EXP2.13 U3.79 | length 1538.9
  Top Layer w8: EXP2.13@535,1605 565,1635 890,1635 1025,1500 1485,1500 1580,1595 1703.13,1595 1731.63,1623.5 1731.73,1623.5 1735,1626.77 1735,1768.79 1747.52,1781.31 U3.79@1747.52,1839.65
MIN_ES1: C1_ES1.1 DA1.1 MIN1_ES1.1 R2_ES1.2 TP9_ES1.1 U3.77 | length 3076.9
  Top Layer w8: v1(1704.95,1630.05) 1686.5,1648.5 1686.5,1762.71 1708.15,1784.36 U3.77@1708.15,1839.65 ; v1(3570,1540) 3570,1690 3565,1695 DA1.1@3572.4,1702.4 3620,1750 3673.03,1750 ; MIN1_ES1.1@3635,2145 3700,2080 3700,1776.97 3673.03,1750 ; R2_ES1.2@3715,1660 3713.03,1661.97 C1_ES1.1@3713.03,1710 3673.03,1750
  Bottom Layer w8: v1(1704.95,1630.05) 1719.95,1630.05 1730,1620 1889.85,1620 1944.85,1565 3545,1565 v1(3570,1540) ; MIN1_ES1.1@3635,2145 TP9_ES1.1@3635,2265
MIN_ES2: C1_ES2.1 DA2.1 MIN1_ES2.1 R2_ES2.2 TP9_ES2.1 U3.100 | length 3267
  Top Layer w8: U3.100@2160.91,1839.65 2160.91,1792.99 v1(2173.9,1780) ; v1(4405,1625) 4405,1704.8 DA2.1@4402.4,1707.4 4435,1740 4518.03,1740 ; MIN1_ES2.1@4465,2145 4525,2085 4525,1746.97 4518.03,1740 ; R2_ES2.2@4550,1660 4550,1708.03 C1_ES2.1@4548.03,1710 4518.03,1740
  Bottom Layer w8: v1(2173.9,1780) 2185,1768.9 2185,1720 2280,1625 4285,1625 4308.5,1648.5 4381.5,1648.5 v1(4405,1625) ; MIN1_ES2.1@4465,2145 TP9_ES2.1@4465,2265
MIN_ES3: C1_ES3.1 DA3.1 MIN1_ES3.1 R2_ES3.2 TP9_ES3.1 U3.88 | length 3281.5
  Top Layer w8: v1(1915,1740) 1915,1783.79 1924.69,1793.47 U3.88@1924.69,1839.65 ; v1(4005,1550) 4005,1640 3987.4,1657.6 DA3.1@3987.4,1707.4 4030,1750 4110,1750 ; MIN1_ES3.1@4050,2145 4120,2075 4120,1759.91 4110.04,1749.96 4133.03,1726.97 C1_ES3.1@4133.03,1710 R2_ES3.2@4133.03,1661.97
  Bottom Layer w8: v1(1915,1740) 1915,1640 1960,1595 3960,1595 v1(4005,1550) ; MIN1_ES3.1@4050,2145 TP9_ES3.1@4050,2265
MISO: EXP0.19 EXP2.19 TP7.1 U3.108 U4_TC1.7 U4_TC2.7 | length 8055.1
  Top Layer w8: EXP2.19@235,1605 370,1740 796.87,1740 806.87,1750 v1(820.94,1750) ; v1(890,1520) 918.23,1520 998.23,1440 1509.85,1440 1604.85,1535 1745,1535 1760,1550 v1(1760,1555) ; U3.108@2318.39,1839.65 2318.39,1777.83 2340,1756.21 v1(2340,1700) 2340,1533.23 2348.5,1524.73 2348.5,1505.27 2335,1491.77 v1(2335,1475) ; v1(2855,2490) 2881.5,2516.5 3432.98,2516.5 3549.48,2400 4477.28,2400 4630,2552.72 4630,2802.72 4716.28,2889 4881,2889 EXP0.19@4910,2860 ; v1(3440,2660) 3590,2660 3610,2680 U4_TC1.7@3610,2769.49 v1(3610,2840) ; v1(3610,3080) U4_TC2.7@3610,3154.49
  Bottom Layer w8: v1@827.5,1742.5 865,1705 865,1545 v1(890,1520) ; v1(1760,1555) 1800,1555 1820,1575 1871.21,1575 1926.21,1520 2260,1520 2305,1475 v1(2335,1475) ; v1(2340,1700) 2400,1640 2745,1640 2795,1690 2795,1870 2828.9,1903.9 2828.9,2415.9 2853.9,2440.9 2853.9,2488.9 v1(2855,2490) 2855,2550 3000,2695 3276,2695 TP7.1@3311,2660 v1(3440,2660) ; v1(3610,2840) 3600,2840 3585,2855 3585,3055 v1(3610,3080)
MOD0E1: TP37_M1.1 U3.84 U7_M1.24 | length 2002.7
  Top Layer w8: U7_M1.24@616.02,942.2 616.02,991.02 645,1020 v1(645,1210) 645,1237.57 787.43,1380 1534.71,1380 1629.71,1475 1805.66,1475 1845.94,1515.28 U3.84@1845.94,1839.65
  Bottom Layer w8: TP37_M1.1@645,1155 v1(645,1210)
MOD0E2: TP37_M2.1 U3.91 U7_M2.24 | length 1293.6
  Top Layer w8: U7_M2.24@1491.02,942.2 1491.02,991.02 1520,1020 v1(1520,1210) 1520,1237.57 1667.43,1385 1901.36,1385 1983.74,1467.38 U3.91@1983.74,1839.65
  Bottom Layer w8: TP37_M2.1@1520,1155 v1(1520,1210)
MOD0E3: TP37_M3.1 U3.98 U7_M3.24 | length 1118.4
  Top Layer w8: U3.98@2121.54,1839.65 2121.54,1784.68 2125,1781.21 2125,1471.36 2226.36,1370 2295.76,1370 2395,1270.76 v1(2395,1210) 2395,1020 2366.02,991.02 U7_M3.24@2366.02,942.2
  Bottom Layer w8: TP37_M3.1@2395,1155 v1(2395,1210)
MOD0E4: TP37_M4.1 U3.113 U7_M4.24 | length 1804.3
  Top Layer w8: U3.113@2389.25,1989.25 2788.17,1989.25 2910,1867.43 2910,1477.43 3017.43,1370 3174.08,1370 3270,1274.08 v1(3270,1210) 3270,1020 3241.02,991.02 U7_M4.24@3241.02,942.2
  Bottom Layer w8: TP37_M4.1@3270,1155 v1(3270,1210)
MOD0E5: TP37_M5.1 U3.120 U7_M5.24 | length 2732.5
  Top Layer w8: U3.120@2389.25,2127.05 2442.95,2127.05 2445,2125 2490,2125 2526.38,2088.62 2816.08,2088.62 3000,1904.71 3000,1514.71 3054.71,1460 3211.36,1460 3306.36,1365 4047.43,1365 4145,1267.43 v1(4145,1210) 4145,1020 4116.02,991.02 U7_M5.24@4116.02,942.2
  Bottom Layer w8: TP37_M5.1@4145,1155 v1(4145,1210)
MOD1E1: TP36_M1.1 U3.83 U7_M1.25 | length 2003.3
  Top Layer w8: U7_M1.25@590.43,942.2 590.43,990.43 610,1010 v1(610,1040) 610,1223.79 781.21,1395 1528.49,1395 1623.49,1490 1799.45,1490 1830,1520.55 1830,1791.21 1826.26,1794.95 U3.83@1826.26,1839.65
  Bottom Layer w8: v1(610,1040) TP36_M1.1@610,1090
MOD1E2: TP36_M2.1 U3.90 U7_M2.25 | length 1291
  Top Layer w8: U7_M2.25@1465.43,942.2 1465.43,990.43 1485,1010 v1(1485,1040) 1485,1223.79 1661.21,1400 1895.15,1400 1964.06,1468.91 U3.90@1964.06,1839.65
  Bottom Layer w8: v1(1485,1040) TP36_M2.1@1485,1090
MOD1E3: TP36_M3.1 U3.97 U7_M3.25 | length 1103.1
  Top Layer w8: U3.97@2101.85,1839.65 2101.85,1783.15 2110,1775 2110,1465.15 2220.15,1355 2289.54,1355 2360,1284.54 v1(2360,1040) 2360,1010 2340.43,990.43 U7_M3.25@2340.43,942.2
  Bottom Layer w8: v1(2360,1040) TP36_M3.1@2360,1090
MOD1E4: TP36_M4.1 U3.117 U7_M4.25 | length 1863.9
  Top Layer w8: U3.117@2389.25,2067.99 v1(2467.01,2067.99) ; v1(2498.9,1955) 2520,1955 2538.5,1973.5 2782.71,1973.5 2895,1861.21 2895,1471.21 3011.21,1355 3167.87,1355 3235,1287.87 v1(3235,1040) 3235,1010 3215.43,990.43 U7_M4.25@3215.43,942.2
  Bottom Layer w8: v1(2467.01,2067.99) 2485,2050 2485,1968.9 v1(2498.9,1955) ; v1(3235,1040) TP36_M4.1@3235,1090
MOD1E5: TP36_M5.1 U3.119 U7_M5.25 | length 2688.5
  Top Layer w8: U3.119@2389.25,2107.36 2486.26,2107.36 2520,2073.62 2809.87,2073.62 2985,1898.49 2985,1508.49 3048.49,1445 3205.15,1445 3300.15,1350 4041.21,1350 4110,1281.21 v1(4110,1040) 4110,1010 4090.43,990.43 U7_M5.25@4090.43,942.2
  Bottom Layer w8: v1(4110,1040) TP36_M5.1@4110,1090
MOD2E1: TP35_M1.1 U3.82 U7_M1.26 | length 2014.6
  Top Layer w8: U7_M1.26@564.84,942.2 564.84,994.84 575,1005 v1(575,1210) 775,1410 1522.28,1410 1617.28,1505 1793.23,1505 1815,1526.77 1815,1785 1806.57,1793.43 U3.82@1806.57,1839.65
  Bottom Layer w8: TP35_M1.1@575,1155 v1(575,1210)
MOD2E2: TP35_M2.1 U3.89 U7_M2.26 | length 1298.5
  Top Layer w8: U7_M2.26@1439.84,942.2 1439.84,994.84 1450,1005 v1(1450,1210) 1655,1415 1888.93,1415 1944.37,1470.44 U3.89@1944.37,1839.65
  Bottom Layer w8: TP35_M2.1@1450,1155 v1(1450,1210)
MOD2E3: TP35_M3.1 U3.96 U7_M3.26 | length 1097.9
  Top Layer w8: U3.96@2082.17,1839.65 2082.17,1775.34 2092.4,1765.11 2092.4,1461.54 2213.93,1340 2283.33,1340 2325,1298.33 v1(2325,1210) 2325,1005 2314.84,994.84 U7_M3.26@2314.84,942.2
  Bottom Layer w8: TP35_M3.1@2325,1155 v1(2325,1210)
MOD2E4: TP35_M4.1 U3.143 U7_M4.26 | length 2307.9
  Top Layer w8: U3.143@2389.25,2579.8 2438.7,2579.8 2443.9,2585 v1(2473.9,2585) ; v1(2568.9,1950) 2785,1950 2880,1855 2880,1465 3005,1340 3161.65,1340 3200,1301.65 v1(3200,1210) 3200,1005 3189.84,994.84 U7_M4.26@3189.84,942.2
  Bottom Layer w8: v1(2473.9,2585) 2518.9,2540 2518.9,2000 v1(2568.9,1950) ; TP35_M4.1@3200,1155 v1(3200,1210)
MOD2E5: TP35_M5.1 U3.118 U7_M5.26 | length 2657.7
  Top Layer w8: U3.118@2389.25,2087.68 2453.46,2087.68 2457.27,2091.49 2478.51,2091.49 2511.38,2058.62 2803.66,2058.62 2970,1892.28 2970,1502.28 3042.28,1430 3198.93,1430 3293.93,1335 4035,1335 4075,1295 v1(4075,1210) 4075,1005 4064.84,994.84 U7_M5.26@4064.84,942.2
  Bottom Layer w8: TP35_M5.1@4075,1155 v1(4075,1210)
MODE0_EXP1: EXP1.1 U3.2 | length 3019.5
  Top Layer w8: U3.2@2298.7,2670.35 2298.7,2621.3 v1(2315,2605)
  Bottom Layer w8: EXP1.1@185,2105 183.79,2105 140,2148.79 140,2291.21 203.79,2355 725,2355 820,2260 820,2135 920,2035 1269.94,2035 1405,2170.06 1405,2300 1475,2370 1981.83,2370 2063.79,2451.96 2063.79,2463.98 2093.31,2493.5 2093.5,2493.5 2115,2515 2115,2566.77 2153.23,2605 2300,2605
MODE0_EXP2: EXP1.20 U3.27 | length 2664.4
  Top Layer w8: v1(1755,2040) 1765,2040 1806.57,2081.57 U3.27@1806.57,2670.35
  Bottom Layer w8: EXP1.20@185,2205 305,2325 710,2325 790,2245 790,2120 1110,1800 1395,1800 1570,1975 1673.23,1975 1698.5,2000.27 1698.5,2012.29 1726.21,2040 v1@1745,2040
MODE1_EXP1: EXP1.2 U3.5 | length 2949.5
  Top Layer w8: v1(2220,2490) 2239.9,2509.9 2239.9,2670.1 U3.5@2239.65,2670.35
  Bottom Layer w8: EXP1.2@235,2105 206,2134 176,2134 155,2155 155,2285 210,2340 718.79,2340 805,2253.79 805,2128.79 913.79,2020 1276.16,2020 1426.5,2170.34 1426.5,2217.71 1459.39,2250.61 1459.39,2262.63 1475.27,2278.5 1553.5,2278.5 1630,2355 1988.04,2355 2079.02,2445.98 2079.02,2458 2099.52,2478.5 2099.71,2478.5 2111.21,2490 v1(2220,2490)
MODE1_EXP2: EXP1.19 U3.26 | length 2647.2
  Top Layer w8: v1(1730,2010) 1771.36,2010 1826.26,2064.9 U3.26@1826.26,2670.35
  Bottom Layer w8: EXP1.19@235,2205 340,2310 703.79,2310 775,2238.79 775,2113.79 1103.79,1785 1401.21,1785 1576.21,1960 1679.45,1960 1713.5,1994.05 1713.5,1994.71 1728.79,2010 v1(1730,2010)
MODE2_EXP1: EXP1.3 U3.6 | length 2997.6
  Top Layer w8: v1(2075,1895) 2075,1925.61 2010.61,1990 2010.61,2036.97 2162.75,2189.11 2162.75,2468.51 2224.9,2530.65 2224.9,2625.1 2219.96,2630.04 U3.6@2219.96,2670.35
  Bottom Layer w8: EXP1.3@285,2105 410,1980 675.44,1980 1035.44,1620 1469.56,1620 1644.56,1795 1975,1795 v1(2075,1895)
MODE2_EXP2: EXP1.18 U3.25 | length 2617.4
  Top Layer w8: v1(1755,1985) 1767.57,1985 1845.94,2063.37 U3.25@1845.94,2670.35
  Bottom Layer w8: EXP1.18@285,2205 375,2295 697.57,2295 760,2232.57 760,2107.57 1097.57,1770 1407.43,1770 1582.43,1945 1685.66,1945 1725.66,1985 v1(1755,1985)
MOSI: EXP0.20 EXP2.20 TP8.1 U3.109 | length 6742
  Top Layer w8: EXP2.20@185,1605 335,1755 790.66,1755 810.66,1775 v1(845,1775) ; v1(915,1490) 980,1425 1516.07,1425 1611.07,1520 1751.21,1520 1761.21,1530 v1(1785,1530) ; v1(2305,1450) 2343.23,1450 2365,1471.77 2365,1752.43 2335.29,1782.14 2335.29,1885.29 2360.51,1910.51 U3.109@2389.25,1910.51 2440.85,1910.51 2484.86,1866.5 2688.5,1866.5 2713.9,1841.1 v1(2713.9,1810) ; v1(2813.9,2480) 2827.4,2466.5 2864.73,2466.5 2899.73,2501.5 3426.76,2501.5 3543.26,2385 4483.49,2385 4645,2546.51 4645,2796.51 4708.49,2860 EXP0.20@4860,2860
  Bottom Layer w8: v1(845,1775) 880,1740 880,1570 913.5,1536.5 913.5,1491.5 v1(915,1490) ; v1(1785,1530) 1795,1540 1806.21,1540 1821.21,1555 1870,1555 1920,1505 2250,1505 v1(2305,1450) ; v1(2713.9,1810) 2780,1876.1 2780,1876.21 2813.9,1910.11 v1(2813.9,2480) 2813.9,2548.9 TP8.1@2815,2550
NetC4_2: C4.2 F4.1 U2.1 | length 225.8
  Top Layer w40: U2.1@5057.17,2172.45 5057.17,2134.83 5090.15,2101.85 C4.2@5090.15,2061 5113,2061 5149,2097 F4.1@5175.94,2097
NetC22_1: C22.1 U1.4 | length 112
  Top Layer w8: U1.4@5104.26,1344.83 5104.26,1322.97 5114.71,1312.52 5169.22,1312.52 C22.1@5184,1327.3
NetC40_1: C40.1 U1.10 | length 93.4
  Top Layer w12: C40.1@5039.23,1624.77 5045.2,1618.8 U1.10@5045.2,1533.8
NetC40_2: C40.2 D2.C L1.1 U1.9 | length 475.6
  Top Layer w12: U1.9@5064.89,1533.8 5064.89,1615.12 5092.77,1643 5141.74,1691.97 5141.74,1811 5191.26,1811 D2.C@5274,1893.74
NetC43_2: C43.2 U3.36 X2.1 | length 416.3
  Top Layer w8: X2.1@1448.9,2965 1448.9,2830 1503.9,2775 1583.9,2775 1627,2731.9 1627,2672.76 U3.36@1629.41,2670.35
NetC44_2: C44.2 U3.35 X2.2 | length 315.6
  Top Layer w8: X2.2@1598.5,2965 1601.46,2962.05 C44.2@1601.46,2855 1601.46,2797.44 1642,2756.9 1642,2731.68 1649.09,2724.59 U3.35@1649.09,2670.35
NetC56_2: C56.2 U6.12 U6.14 | length 317.3
  Top Layer w22: U6.12@1150.12,2815 v1(1235,2815) ; U6.14@1150.12,2915 v1(1235,2915) C56.2@1282.56,2915
  Bottom Layer w22: v1(1235,2815) v1(1235,2915)
NetC58_2: C58.2 U6.1 USB.1 | length 552.2
  Top Layer w10: v2(620,3000) 642.56,3022.56 C58.2@705,3022.56 727.44,3022.56 735,3015 U6.1@789.88,3015
  Bottom Layer w10: USB.1@361,2755 570,2964 570,2980 590,3000 v2(620,3000)
NetC59_2: C59.2 U6.3 U6.4 U6.5 | length 238
  Top Layer w20: C59.2@655,2907.44 692.44,2907.44 700,2915 U6.3@789.88,2915 U6.4@789.88,2865 U6.5@789.88,2815
NetC66_M1_2: C66_M1.2 R30_M1.2 U7_M1.3 | length 216.1
  Top Layer w8: R30_M1.2@410,609.53 484.53,609.53 564.84,689.84 U7_M1.3@564.84,717.8
NetC66_M2_2: C66_M2.2 R30_M2.2 U7_M2.3 | length 219.7
  Top Layer w8: R30_M2.2@1285,609.53 1365.74,609.53 1439.84,683.63 U7_M2.3@1439.84,717.8
NetC66_M3_2: C66_M3.2 R30_M3.2 U7_M3.3 | length 216.8
  Top Layer w8: R30_M3.2@2160,609.53 2235.74,609.53 2314.84,688.63 U7_M3.3@2314.84,717.8
NetC66_M4_2: C66_M4.2 R30_M4.2 U7_M4.3 | length 216.1
  Top Layer w8: R30_M4.2@3035,609.53 3109.53,609.53 3189.84,689.84 U7_M4.3@3189.84,717.8
NetC66_M5_2: C66_M5.2 R30_M5.2 U7_M5.3 | length 216.1
  Top Layer w8: R30_M5.2@3910,609.53 3984.53,609.53 4064.84,689.84 U7_M5.3@4064.84,717.8
NetC68_M1_1: C68_M1.1 U7_M1.1 | length 256
  Top Layer w8: C68_M1.1@350,607.56 340,617.56 340,630 360,650 479,650 513.66,684.66 U7_M1.1@513.66,717.8
NetC68_M1_2: C68_M1.2 U7_M1.2 | length 302.4
  Top Layer w8: C68_M1.2@350,552.44 370,572.44 370,620 385,635 485.21,635 539.25,689.04 U7_M1.2@539.25,717.8
NetC68_M2_1: C68_M2.1 U7_M2.1 | length 259.5
  Top Layer w8: C68_M2.1@1225,607.56 1215,617.56 1215,630 1236,651 1361,651 1388.66,678.66 U7_M2.1@1388.66,717.8
NetC68_M2_2: C68_M2.2 U7_M2.2 | length 308.2
  Top Layer w8: C68_M2.2@1225,552.44 1245,572.44 1245,620 1261,636 1371,636 1414.25,679.25 U7_M2.2@1414.25,717.8
NetC68_M3_1: C68_M3.1 U7_M3.1 | length 256.6
  Top Layer w8: C68_M3.1@2100,607.56 2090,617.56 2090,630 2111,651 2231,651 2263.66,683.66 U7_M3.1@2263.66,717.8
NetC68_M3_2: C68_M3.2 U7_M3.2 | length 305.3
  Top Layer w8: C68_M3.2@2100,552.44 2120,572.44 2120,620 2136,636 2241,636 2289.25,684.25 U7_M3.2@2289.25,717.8
NetC68_M4_1: C68_M4.1 U7_M4.1 | length 253.7
  Top Layer w8: C68_M4.1@2975,607.56 2965,617.56 2965,630 2985,650 3100,650 3138.66,688.66 U7_M4.1@3138.66,717.8
NetC68_M4_2: C68_M4.2 U7_M4.2 | length 302.3
  Top Layer w8: C68_M4.2@2975,552.44 2995,572.44 2995,620 3010,635 3110,635 3164.25,689.25 U7_M4.2@3164.25,717.8
NetC68_M5_1: C68_M5.1 U7_M5.1 | length 253.7
  Top Layer w8: C68_M5.1@3850,607.56 3840,617.56 3840,630 3860,650 3975,650 4013.66,688.66 U7_M5.1@4013.66,717.8
NetC68_M5_2: C68_M5.2 U7_M5.2 | length 302.3
  Top Layer w8: C68_M5.2@3850,552.44 3870,572.44 3870,620 3885,635 3985,635 4039.25,689.25 U7_M5.2@4039.25,717.8
NetC71_M1_2: C71_M1.2 U7_M1.15 | length 94.4
  Top Layer w8: C71_M1.2@842.44,1035 846.34,1031.1 U7_M1.15@846.34,942.2
NetC71_M2_2: C71_M2.2 U7_M2.15 | length 94.4
  Top Layer w8: C71_M2.2@1717.44,1035 1721.34,1031.1 U7_M2.15@1721.34,942.2
NetC71_M3_2: C71_M3.2 U7_M3.15 | length 94.4
  Top Layer w8: C71_M3.2@2592.44,1035 2596.34,1031.1 U7_M3.15@2596.34,942.2
NetC71_M4_2: C71_M4.2 U7_M4.15 | length 94.4
  Top Layer w8: C71_M4.2@3467.44,1035 3471.34,1031.1 U7_M4.15@3471.34,942.2
NetC71_M5_2: C71_M5.2 U7_M5.15 | length 94.4
  Top Layer w8: C71_M5.2@4342.44,1035 4346.34,1031.1 U7_M5.15@4346.34,942.2
NetC73_2: C73.2 R23.2 U3.40 | length 282.9
  Top Layer w10: C73.2@1321.46,2586.22 1321.46,2540.43 U3.40@1558.54,2540.43
NetC75_M1_2: C75_M1.2 R31_M1.1 U7_M1.12 U7_M1.13 | length 226.9
  Top Layer w8: U7_M1.12@795.16,717.8 U7_M1.13@820.75,717.8 820.75,684.25 865.47,639.53 R31_M1.1@970,639.53
NetC75_M2_2: C75_M2.2 R31_M2.1 U7_M2.12 U7_M2.13 | length 226.9
  Top Layer w8: U7_M2.12@1670.16,717.8 U7_M2.13@1695.75,717.8 1695.75,684.25 1720,660 1767.56,660 1788.03,639.53 R31_M2.1@1845,639.53
NetC75_M3_2: C75_M3.2 R31_M3.1 U7_M3.12 U7_M3.13 | length 226.9
  Top Layer w8: U7_M3.12@2545.16,717.8 U7_M3.13@2570.75,717.8 2570.75,684.25 2595,660 2642.56,660 2663.03,639.53 R31_M3.1@2720,639.53
NetC75_M4_2: C75_M4.2 R31_M4.1 U7_M4.12 U7_M4.13 | length 226.9
  Top Layer w8: U7_M4.12@3420.16,717.8 U7_M4.13@3445.75,717.8 3445.75,684.25 3470,660 3517.56,660 3538.03,639.53 R31_M4.1@3595,639.53
NetC75_M5_2: C75_M5.2 R31_M5.1 U7_M5.12 U7_M5.13 | length 226.9
  Top Layer w8: U7_M5.12@4295.16,717.8 U7_M5.13@4320.75,717.8 4320.75,684.25 4345,660 4392.56,660 4413.03,639.53 R31_M5.1@4470,639.53
NetD2_A: D2.A R9.2 U1.8 | length 326.9
  Top Layer w12: U1.8@5084.57,1533.8 5084.57,1565.67 5123.78,1604.88 5143,1604.88
  Top Layer w50: 5143,1604.88 5247.74,1604.88 R9.2@5273,1630.14 ; R9.2@5273,1645.14 D2.A@5273,1725
NetD7_2: D7.2 R8.1 | length 60
  Top Layer w15: D7.2@4798.57,1309.04 R8.1@4798.57,1369.01
NetD9_2: D9.2 R11.1 | length 56
  Top Layer w40: D9.2@5088.73,2565 R11.1@5144.69,2565
NetD10_1: D10.1 FAN-1.2 Q2.3 | length 400.9
  Top Layer w10: v2(930,3970) 930,4000 940,4010 Q2.3@940,4093.01
  Top Layer w15: D10.1@1138.5,3871.61 v2(1138.5,3913.5)
  Bottom Layer w10: v2(930,3970) 960,3940 1112.01,3940 v2(1138.5,3913.5)
NetD10_2: D10.2 R13.2 | length 48.5
  Top Layer w15: D10.2@1143.5,3958.23 R13.2@1143.5,4006.69
NetD11_1: D11.1 FAN-2.2 Q3.3 | length 406.9
  Top Layer w10: v2(495,3970) 495,4000 505,4010 Q3.3@505,4093.01
  Top Layer w15: D11.1@693.5,3870 D11.1@697.7,3865.81 ; D11.1@703.5,3871.61 v2(703.5,3913.5)
  Bottom Layer w10: v2(495,3970) 525,3940 677.01,3940 v2(703.5,3913.5)
NetD11_2: D11.2 R47.2 | length 52
  Top Layer w15: D11.2@703.5,3958.23 R47.2@703.5,4010.2
NetD12_1: D12.1 D13.1 FETS.2 Q4.5 TP11.1 | length 142.7
  Bottom Layer w10: TP11.1@1790,4220 FETS.2@1790,4361.32
  Bottom Layer w40: FETS.2@1790,4361.32 FETS.2@1791,4362.32
NetD13_2: D13.2 R56.1 | length 54.1
  Top Layer w8: D13.2@1528.5,3711.87 D13.2@1530,3713.36
  Top Layer w15: D13.2@1530,3713.36 R56.1@1530,3765.33
NetD14_1: D14.1 D15.1 FETS.4 Q5.5 TP12.1 | length 141.3
  Bottom Layer w10: TP12.1@2191,4221 FETS.4@2191,4362.32
NetD14_2: D14.2 R60.1 | length 52
  Top Layer w15: D14.2@1924,3713.36 R60.1@1924,3765.33
NetD16_1: D16.1 D17.1 FETS.6 Q6.5 TP13.1 | length 141.3
  Bottom Layer w10: TP13.1@2591,4221 FETS.6@2591,4362.32
NetD16_2: D16.2 R64.1 | length 52
  Top Layer w12: D16.2@2328.5,3711.44 R64.1@2328.5,3763.41
NetD18_1: D18.1 D19.1 FETS.8 Q7.5 TP14.1 | length 141.3
  Bottom Layer w10: TP14.1@2991,4221 FETS.8@2991,4362.32
NetD18_2: D18.2 R68.1 | length 52
  Top Layer w12: D18.2@2730,3712.94 R68.1@2730,3764.91
NetF1_1: "Heat Power.3" F1.1
NetF2_1: "Heat Power.1" F2.1
  other v1: 4584,3985 4645,3985 4706,3985 4767,3985 4828,3985 4889,3985 4950,3985 4584,4046 4645,4046 4706,4046 4767,4046 4828,4046 4889,4046 4950,4046 5011,4046 5072,4046 4584,4107 4645,4107 4706,4107 4767,4107 4828,4107 4889,4107 4950,4107 4706,4168 4889,4168 4950,4168 5010,4168 5070,4168 5130,4168 5190,4168 5250,4168 5310,4168 5370,4168 5430,4168 4950,4229 5010,4229 5070,4229 5130,4229 5190,4229 5250,4229 5310,4229 5370,4229 5430,4229 4950,4289 5010,4289 5070,4289 5130,4289 5190,4289 5310,4289 5370,4289 5250,4290 5430,4290 4950,4350 5010,4350 5070,4350 5130,4350 5190,4350 5310,4350 5370,4350 5250,4351 5430,4351 4830,4411 4890,4411 4950,4411 5010,4411 5070,4411 5130,4411 5190,4411 5250,4411 4830,4471 4890,4471 4950,4471 5010,4471 5070,4471 5130,4471 5190,4471 5250,4472 4590,4532 4650,4532 4710,4532 4770,4532 4830,4532 4890,4532 4950,4532 5010,4532 5070,4532 5130,4532 5190,4532 5250,4533
NetF3_1: "Motor Power.1" F3.1
  other v1: 5220,520 5285,520 5350,520 5415,520 5185,555 5165,600 5415,600 5185,650 5285,670 5355,670 5415,670 5115,760 5175,760 5235,760 5295,760 5355,760 5415,760 5300,1035 5360,1035 5420,1036 5120,1096 5180,1096 5240,1096 5300,1096 5360,1096 5420,1096
NetF4_2: F4.2 R25.2 | length 110.7
  Top Layer w40: R25.2@5294.06,1986.25 F4.2@5294.06,2097